# Altium PCB test.PcbDoc
Units mil, origin at the board's own origin, x right, y up, seen from the top; angles counter-clockwise.
Board outline 6000 x 4000 mil, 2 copper layers (Top Layer, Bottom Layer); 63 components, 94 nets, 265 pads, 0 vias.
Unrouted connection lines stored in the file: 164.
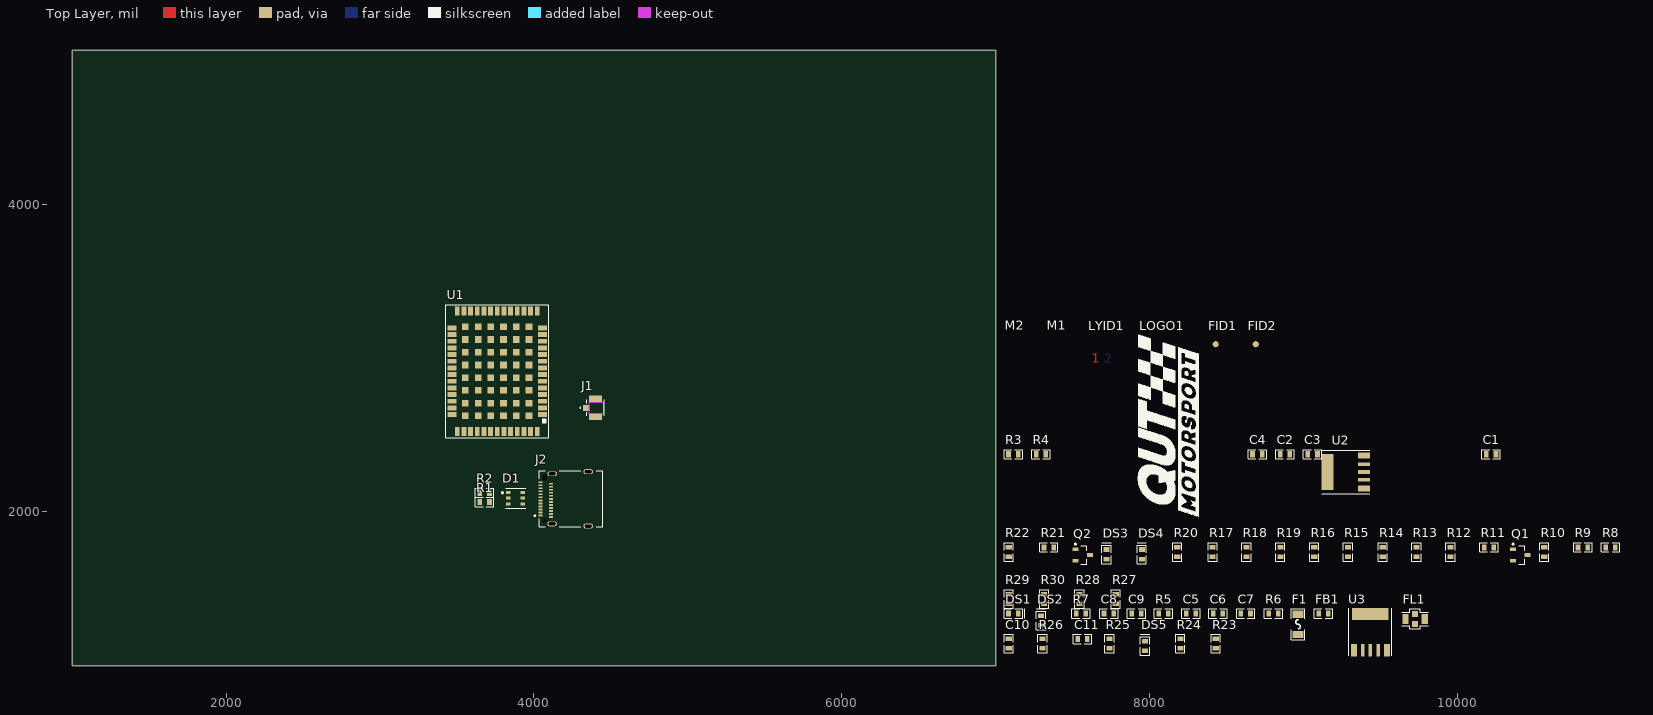
[diagram p0: Top Layer view]
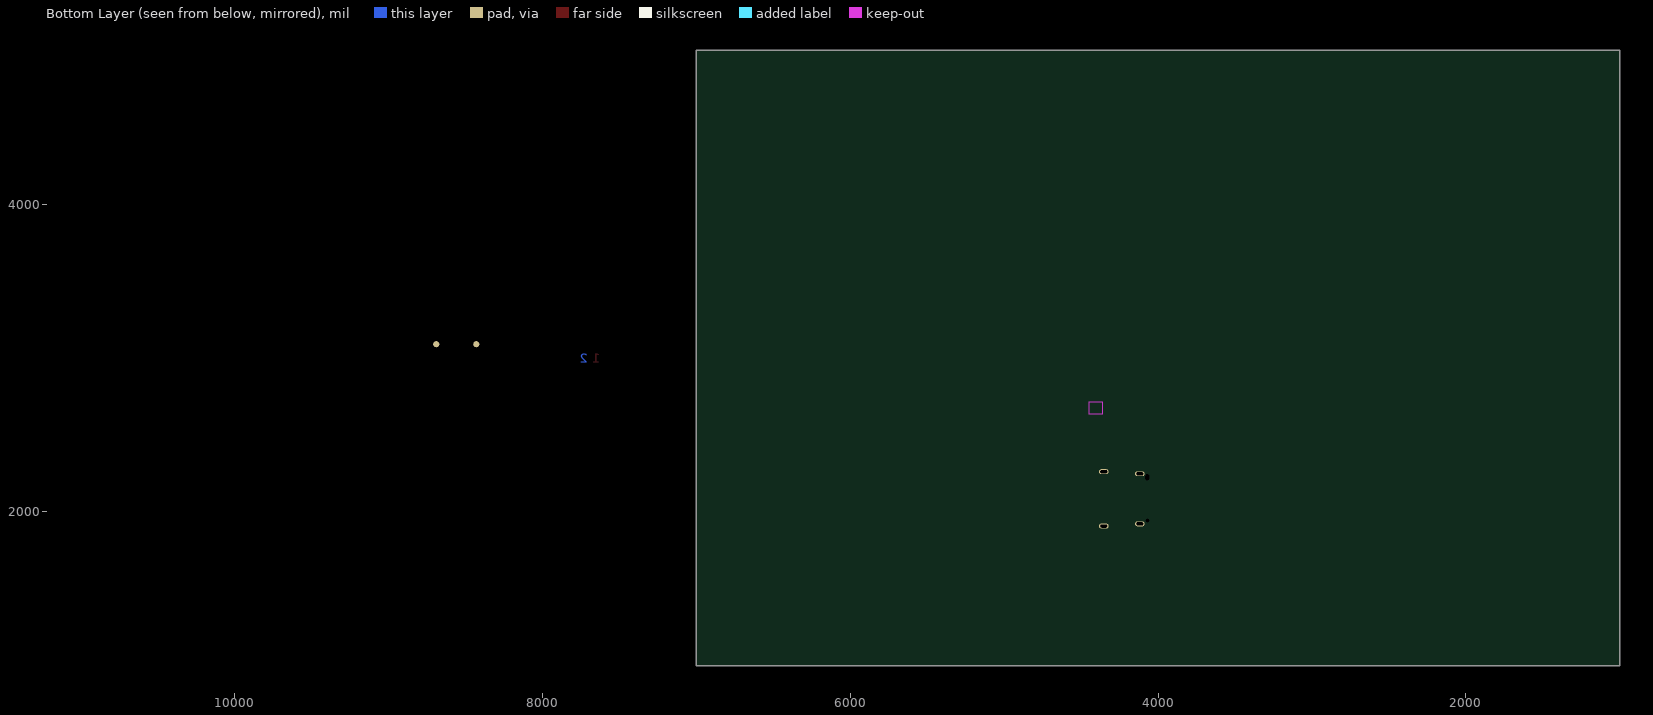
[diagram p1: Bottom Layer view, seen from below]

## Layer stack, top to bottom
Top Solder: solder mask 0.4, Solder Resist, Dk 3.5
Top Layer: signal copper 1.4
Dielectric 1: dielectric 12.6, FR-4, Dk 4.8
Bottom Layer: signal copper 1.4
Bottom Solder: solder mask 0.4, Solder Resist, Dk 3.5

## Board outline
1000,1000 7000,1000 7000,5000 1000,5000

## Design rules (kind name [scope] priority, off if disabled: settings)
Clearance [All] p1: gap=10 ignorepadtopadclearanceinfootprint=FALSE except(0: Arc-Hole Track-Hole SMDPad-Hole THPad-Hole Via-Hole Fill-Hole Poly-Hole Region-Hole Text-Hole)
PolygonConnect [All] p1: connectstyle=Relief reliefconductorwidth=10 reliefentries=4 polygonreliefangle="90 Angle" airgapwidth=10
RoomDefinition Designator [InComponentClass('Designator')] p1: confinementstyle=ConfineIn formatcopy=TRUE lockcomponents=FALSE outline 7045,1060 8585,1060 8585,1315 7045,1315
RoutingVias [All] p1: holewidth=28 width=50 viastyle="Through Hole" minholewidth=28 minwidth=50 maxholewidth=28 maxwidth=50
SolderMaskExpansion [All] p1: expansion=4 istentingtop=FALSE
Width "Schematic Width Constraint" [InNet('GPS RF IN')] p1: maxlimit=13.8 minlimit=13.8 preferedwidth=13.8 minimp=50.000000 maximp=50.000000 favimp=50.000000
Width [All] p2: maxlimit=10 minlimit=10 preferedwidth=10
30 further rules are at their usual default settings.

## Classes and differential pairs
component class RADG-Master-S00-V00: FID1 FID2 LOGO1 LYID1 M1 M2
component class "GPS Module": C1 C2 C3 C4 DS1 DS3 DS4 J1 Q1 Q2 R1 R2 R3 R4 R5 R8 R9 R10 R11 R12 R13 R14 R15 R16 R17 R18 R19 R20 R21 R22 SW1 U1
component class Designator: C5 C6 C7 C8 C9 C10 C11 DS2 DS5 F1 FB1 FL1 R6 R7 R23 R24 R25 R26 U2 U3

## Components (designator, comment, footprint, x,y, rotation, side; value= is the part's Value field where it differs from the comment)
C1 "1uF" Cap_Ceramic_0603 10220,2375 r0 top
C2 "1uF" Cap_Ceramic_0603 8880,2375 r0 top
C3 "100nF" Cap_Ceramic_0603 9060,2375 r0 top
C4 "1uF" Cap_Ceramic_0603 8700,2375 r0 top
C5 "10nF" Cap_Ceramic_0603 8270,1340 r0 top
C6 "1uF" Cap_Ceramic_0603 8445,1340 r0 top
C7 "100nF" Cap_Ceramic_0603 8625,1340 r0 top
C8 "10nF" Cap_Ceramic_0603 7735,1340 r0 top
C9 "1uF" Cap_Ceramic_0603 7915,1340 r0 top
C10 "1uF" Cap_Ceramic_0603 7085,1145 r90 top
C11 "1uF" Cap_Ceramic_0603 7565,1175 r0 top
D1 "PRTR5V0U4D" SC-47 3880,2090 r0 top
DS1 "LED Yellow 0603" "LED YELLOW 0603" 7115,1340 r0 top
DS2 "LED Green 0603" "LED GREEN 0603" 7295,1295 r90 top
DS3 "LED Yellow 0603" "LED YELLOW 0603" 7720,1725 r90 top
DS4 "LED Yellow 0603" "LED YELLOW 0603" 7950,1725 r90 top
DS5 "LED Green 0603" "LED GREEN 0603" 7970,1130 r90 top
F1 "0ZCJ0050FF2G" "1206 Fuse" 8965,1270 r90 top
FB1 "742792651" Inductor_0603 9130,1340 r0 top
FID1 "Fiducial 1MM" "FIDUCIAL 1MM" 8430,3090 r0 top
FID2 "Fiducial 1MM" "FIDUCIAL 1MM" 8690,3090 r90 top
FL1 "NFE31PT101C1E9L" NFE31PT101C1E9L 9725,1305 r0 top
J1 "U.FL-R-SMT HIROSE" "U.FL-R-SMT HIROSE" 4400,2676.93 r0 top
J2 "12401610E4#2A" 12401610E4#2A 4069.06,2085.32 r90 top
LOGO1 "30mm Wide QUTMS Logo" "QUTMS LOGO 30MM" 8320,1970 r90 top
LYID1 "2 Layer Identification PCB Marker" "LAYER IDENT 2" 7680,3000 r0 top
M1 "Hole M3 Loose Unplated" "M3.5 UNPLATED" 7430,3045 r0 top
M2 "Hole M3 Loose Unplated" "M3.5 UNPLATED" 7160,3045 r0 top
Q1 "2N7002" SOT23-3 10410,1720 r0 top
Q2 "2N7002" SOT23-3 7565,1720 r0 top
R1 "33R" Res_ThinFilm_0603 3680,2065 r180 top
R2 "33R" Res_ThinFilm_0603 3680,2125 r180 top
R3 "33R" Res_ThinFilm_0603 7115,2375 r0 top
R4 "33R" Res_ThinFilm_0603 7295,2375 r0 top
R5 "33R" Res_ThinFilm_0603 8090,1340 r0 top
R6 "1k" Res_ThinFilm_0603 8805,1340 r0 top
R7 "0R" Res_ThinFilm_0603 7555,1340 r0 top
R8 "33R" Res_ThinFilm_0603 10995,1770 r0 top
R9 "33R" Res_ThinFilm_0603 10815,1770 r0 top
R10 "33R" Res_ThinFilm_0603 10565,1740 r90 top
R11 "33R" Res_ThinFilm_0603 10205,1770 r0 top
R12 "33R" Res_ThinFilm_0603 9955,1740 r90 top
R13 "33R" Res_ThinFilm_0603 9735,1740 r90 top
R14 "10k" Res_ThinFilm_0603 9515,1740 r90 top
R15 "33R" Res_ThinFilm_0603 9290,1740 r90 top
R16 "33R" Res_ThinFilm_0603 9070,1740 r90 top
R17 "1k" Res_ThinFilm_0603 8410,1740 r90 top
R18 "1k" Res_ThinFilm_0603 8630,1740 r90 top
R19 "1k" Res_ThinFilm_0603 8850,1740 r90 top
R20 "10k 5% 0603" Res_ThinFilm_0603 8180,1740 r90 top
R21 "33R" Res_ThinFilm_0603 7345,1770 r0 top
R22 "10k" Res_ThinFilm_0603 7085,1740 r90 top
R23 "1k" Res_ThinFilm_0603 8430,1145 r90 top
R24 "10k" Res_ThinFilm_0603 8200,1145 r90 top
R25 "DNF 0603" Res_ThinFilm_0603 7740,1145 r90 top
R26 "0R" Res_ThinFilm_0603 7305,1145 r90 top
R27 "22R" Res_ThinFilm_0603 7780,1435 r90 top
R28 "22R" Res_ThinFilm_0603 7545,1435 r90 top
R29 "5k1 1%" Res_ThinFilm_0603 7085,1435 r90 top
R30 "5k1 1%" Res_ThinFilm_0603 7315,1435 r90 top
U1 "ZED-F9P" uBlox_ZED-F9P 4095.63,2480.94 r90 top
U2 "MCP1826T-3302E/DC" SOT-223-5 9275,2260 r90 top
U3 "MCP1826T-3302E/DC" SOT-223-5 9435,1220 r0 top

## Footprints (in the part's own frame and the unit in brackets; to place one, negate y for a bottom-side part, rotate by r counter-clockwise, add the part's x,y. Pads: shape width x height; smd on the part's side, far side on the other; paste and mask are expansions set on the pad)
"1206 Fuse" [mil]
  rect 47x71 smd: 1(-66.08,0) 2(66.08,0)
  silkscreen extent -100,-45 100,45, body extent -67,-33 67,33, height 28
12401610E4#2A [mm]
  rect 0.3x0.7 smd: A1(-2.75,0.66) A2(-2.25,0.66) A3(-1.75,0.66) A4(-1.25,0.66) A5(-0.75,0.66) A6(-0.25,0.66) A7(0.25,0.66) A8(0.75,0.66) A9(1.25,0.66) A10(1.75,0.66) A11(2.25,0.66) A12(2.75,0.66) B1(2.5,-1.04) B2(2,-1.04) B3(1.5,-1.04) B4(1,-1.04) B5(0.5,-1.04) B6(0,-1.04) B7(-0.5,-1.04) B8(-1,-1.04) B9(-1.5,-1.04) B10(-2,-1.04) B11(-2.5,-1.04) B12(-3,-1.04)
  oval 0.8x1.6 hole 0.5 slot 1.1 at 90 deg: S1(-4.13,-1.25) S2(4.13,-1.25) S3(4.49,-7.2) S4(-4.49,-7.2)
  round 0 hole 0.65 unplated: ""(-3.6,0)
  round 0 hole 0.65 slot 1.016 at 0 deg unplated mask+0: ""(3.559,0)
  silkscreen extent -4.6,-9.59 4.6,1.7, body extent -4.6,-9.53 4.6,1.02, height 3.3
Cap_Ceramic_0603 [mil]
  rect 30x40 smd: 1(-31.24,0) 2(31.24,0)
  silkscreen extent -60,-30 60,30, body extent -31,-16 32,16, height 33
"FIDUCIAL 1MM" [mm]
  round 1 smd mask+1: 1(0,0)
  round 1 smd far side mask+1: 1(0,0)
  Top Layer pour cut-out: 0.003,-1.516 -0.579,-1.4 -1.073,-1.07 -1.403,-0.577 -1.518,0.006 -1.518,0.006 -1.403,0.588 -1.073,1.081 -0.579,1.411 0.003,1.527 0.003,1.527 0.585,1.411 1.078,1.081 1.408,0.588 1.524,0.006 1.524,0.006 1.408,-0.577 1.078,-1.07 0.585,-1.4 0.003,-1.516
  Bottom Layer pour cut-out: 0.003,-1.516 -0.579,-1.4 -1.073,-1.07 -1.403,-0.577 -1.518,0.006 -1.518,0.006 -1.315,0.766 -0.758,1.323 0.003,1.527 0.003,1.527 0.585,1.411 1.078,1.081 1.408,0.588 1.524,0.006 1.524,0.006 1.408,-0.577 1.078,-1.07 0.585,-1.4 0.003,-1.516
Inductor_0603 [mil]
  rect 30x40 smd: 1(-31.24,0) 2(31.24,0)
  silkscreen extent -60,-30 60,30, body extent -31,-16 32,16, height 18
"LAYER IDENT 2" [mil]
  Top Layer pour cut-out: -90,50 -90,-50 90,-50 90,50
  Bottom Layer pour cut-out: -90,50 -90,-50 90,-50 90,50
"LED GREEN 0603" [mil]
  rect 30x40 smd: 1(-31.24,0) 2(31.24,0)
  silkscreen extent -60,-30 75,30, body extent -40,-20 40,20, height 30
"LED YELLOW 0603" [mil]
  rect 30x40 smd: 1(-31.24,0) 2(31.24,0)
  silkscreen extent -60,-30 75,30, body extent -40,-20 40,20, height 30
"M3.5 UNPLATED" [mm]
  round 0 hole 3.5 unplated mask+2.6: 1(0,0)
  Top Layer pour cut-out: 0,-2.794 -1.069,-2.581 -1.976,-1.976 -2.581,-1.069 -2.794,0 -2.794,0 -2.581,1.069 -1.976,1.976 -1.069,2.581 0,2.794 0,2.794 1.069,2.581 1.976,1.976 2.581,1.069 2.794,0 2.794,0 2.581,-1.069 1.976,-1.976 1.069,-2.581 0,-2.794
  Bottom Layer pour cut-out: 0,-2.794 -1.069,-2.581 -1.976,-1.976 -2.581,-1.069 -2.794,0 -2.794,0 -2.581,1.069 -1.976,1.976 -1.069,2.581 0,2.794 0,2.794 1.069,2.581 1.976,1.976 2.581,1.069 2.794,0 2.794,0 2.581,-1.069 1.976,-1.976 1.069,-2.581 0,-2.794
NFE31PT101C1E9L [mm]
  rect 1x1.6 smd: 1(-1.6,0) 3(1.6,0)
  rect 1x1 smd: 2(0,-0.8) 2(0,0.8)
  silkscreen extent -2.16,-1.65 2.16,1.65, body extent -1.6,-0.89 1.6,0.86, height 1.61
"QUTMS LOGO 30MM" [mil]
  silkscreen extent -1,1 1182,398
Res_ThinFilm_0603 [mil]
  rect 30x40 smd: 1(-31.24,0) 2(31.24,0)
  silkscreen extent -60,-30 60,30, body extent -31,-16 32,16, height 18
SC-47 [mm]
  rect 0.8x0.5 smd: 1(-1.2,0.95) 2(-1.2,0) 3(-1.2,-0.95) 4(1.2,-0.95) 5(1.2,0) 6(1.2,0.95)
  silkscreen extent -2.29,-1.65 1.65,1.65, body extent -1.3,-1.45 1.3,1.45, height 1.14
SOT23-3 [mm] "SOT23, 3-Leads, Body 2.90x2.45mm, Pitch 0.95mm, IPC Medium Density"
  rect 1x0.6 smd: D(1.2,0) G(-1.2,0.95) S(-1.2,-0.95)
  silkscreen extent -1.32,-1.5 0.7,1.92, body extent -1.3,-1.5 1.3,1.5, height 1.1
SOT-223-5 [mm]
  rect 1x2 smd: 1(-2.74,-3) 5(2.74,-3)
  rect 0.6x2 smd: 2(-1.27,-3) 3(0,-3) 4(1.27,-3)
  rect 6x2 smd: EP(0,3)
  silkscreen extent -3.56,-3.94 3.56,3.94, body extent -3.27,-3.63 3.28,3.63, height 1.8
"U.FL-R-SMT HIROSE" [mm]
  rect 1.05x1 smd: 1(-1.525,0)
  rect 2.2x1.05 smd: 2(0,-1.475) 2(0,1.475)
  Keep-Out Layer region: 1.3,-0.95 -1,-0.95 -1,0.95 1.3,0.95
  silkscreen extent -2.57,-1.3 1.42,1.3, body extent -1.55,-1.5 1.55,1.5, height 1.25
uBlox_ZED-F9P [mm]
  rect 0.8x1.5 smd: 1(3.85,1.05) 2(4.95,1.05) 3(6.05,1.05) 4(7.15,1.05) 5(8.25,1.05) 6(9.35,1.05) 7(10.45,1.05) 8(11.55,1.05) 9(12.65,1.05) 10(13.75,1.05) 11(14.85,1.05) 12(15.95,1.05) 13(17.05,1.05) 14(18.15,1.05) 28(18.15,15.95) 29(17.05,15.95) 30(15.95,15.95) 31(14.85,15.95) 32(13.75,15.95) 33(12.65,15.95) 34(11.55,15.95) 35(10.45,15.95) 36(9.35,15.95) 37(8.25,15.95) 38(7.15,15.95) 39(6.05,15.95) 40(4.95,15.95) 41(3.85,15.95)
  rect 1.5x0.8 smd: 15(20.95,1.9) 16(20.95,3) 17(20.95,4.1) 18(20.95,5.2) 19(20.95,6.3) 20(20.95,7.4) 21(20.95,8.5) 22(20.95,9.6) 23(20.95,10.7) 24(20.95,11.8) 25(20.95,12.9) 26(20.95,14) 27(20.95,15.1) 42(1.05,15.1) 43(1.05,14) 44(1.05,12.9) 45(1.05,11.8) 46(1.05,10.7) 47(1.05,9.6) 48(1.05,8.5) 49(1.05,7.4) 50(1.05,6.3) 51(1.05,5.2) 52(1.05,4.1) 53(1.05,3) 54(1.05,1.9)
  rect 1.1x1.1 smd: 55(3.65,7.45) 55(3.65,9.55) 55(3.65,11.65) 55(3.65,13.75) 55(3.65,3.25) 55(3.65,5.35) 55(5.75,7.45) 55(5.75,9.55) 55(5.75,11.65) 55(5.75,13.75) 55(5.75,3.25) 55(5.75,5.35) 55(7.85,13.75) 55(7.85,3.25) 55(7.85,5.35) 55(7.85,7.45) 55(7.85,9.55) 55(7.85,11.65) 55(9.95,13.75) 55(9.95,3.25) 55(9.95,5.35) 55(9.95,7.45) 55(9.95,9.55) 55(9.95,11.65) 55(12.05,13.75) 55(12.05,3.25) 55(12.05,5.35) 55(12.05,7.45) 55(12.05,9.55) 55(12.05,11.65) 55(14.15,3.25) 55(14.15,5.35) 55(14.15,7.45) 55(14.15,9.55) 55(14.15,11.65) 55(14.15,13.75) 55(16.25,3.25) 55(16.25,5.35) 55(16.25,7.45) 55(16.25,9.55) 55(16.25,11.65) 55(16.25,13.75) 55(18.35,3.25) 55(18.35,5.35) 55(18.35,7.45) 55(18.35,9.55) 55(18.35,11.65) 55(18.35,13.75)
  silkscreen extent 0,0 22,17, body extent 0,0 22,17, height 2.3

## Part data
C1 C2 C4 C6 C9 C10 C11: library part "1uF 25V 5% X7R 0603", "Capacitor, Ceramic, SMD, 1uF, 25V, 5%, X7R, 0603"
C3 C7: library part "100nF 50V 5% X7R 0603", "Capacitor, Ceramic, SMD, 100nF, 50V, 5%, X7R, 0603"
C5 C8: library part "10nF 50V 5% X7R 0603", "Capacitor, Ceramic, SMD, 10nF, 50V, 5%, X7R, 0603"
D1: "Clamp Ipp Tvs Diode Surface Mount 6-TSOP"
F1: "Polymeric PTC Resettable Fuse 8V 500mA Ih Surface Mount 1206 (3216 Metric), Concave"
FB1: "600 Ohms @ 100MHz 1 Signal Line Ferrite Bead 0603 (1608 Metric) 1A 200mOhm"
FL1: "LC (T-Type) EMI Filter 3rd Order Low Pass 1 Channel C = 100pF 6A 1206 (3216 Metric), 3 PC Pad"
J1: library part U.FL-R-SMT(10), "U.FL (UMCC) Connector Receptacle, Male Pin 50Ohm Surface Mount Solder"
J2: "USB-C (USB TYPE-C) USB 3.2 Gen 2 (USB 3.1 Gen 2, Superspeed + (USB 3.1)) Receptacle Connector 24 Position Surface Mount, Right Angle; Through Hole"
LOGO1: library part "QUTMS Logo 30mm"
LYID1: library part "Layer Identification 2"
M1 M2: "M3.5 Hole, No Plating"
R1 R2 R3 R4 R5 R8 R9 R10 R11 R12 R13 R15 R16 R21: library part "33R 5% 0603", "Resistor, SMD, 33R, 0.1W, 5%, 0603"
R6 R17 R18 R19 R23: library part "1k 5% 0603", "Resistor, SMD, 1k, 0.1W, 5%, 0603"
R7 R26: library part "0R 5% 0603", "Resistor, SMD, 0R, 0.1W, 5%, 0603"
R14 R22 R24: library part "10k 5% 0603", "Resistor, SMD, 10k, 0.1W, 5%, 0603"
R20: "Resistor, SMD, 10k, 0.1W, 5%, 0603"
R25: "Resistor, SMD, DNF, 0.1W, 0603"
R27 R28: library part "22R 5% 0603", "Resistor, SMD, 22R, 0.1W, 5%, 0603"
R29 R30: library part "5k1 1% 0603", "Resistor, SMD, 5k1, 0.1W, 1%, 0603"
U2 U3: "Linear Voltage Regulator IC Positive Fixed 1 Output 1A SOT-223-5"

## Nets (pads, with @x,y where several pads share a name; then routed paths per layer and width w, separated by ;. In a path a pad name is that pad's centre, name@x,y a point inside that pad or via, vN(x,y) a via of type N, cw(c..) or ccw(c..) an arc to the next point about the centre after c; other vN are vias at no path point)
3V3: C2.2 C3.2 C7.2 FL1.3 R6.2 R20.2 U1.33 U1.34
"3V3 LED": DS2.1 R6.1
5V: C8.2 C9.2 C10.2 FB1.2 R23.2 R25.1 U2.1 U2.2 U3.2
"5V LED": DS5.1 R23.1
"CON DSEL": R12.2
"CON DSEL M": Q1.G R12.1 R14.2
"CON EXTINT": R11.1
"CON GEOFENCE": R15.1 R18.2
"CON RESET": R21.2
"CON RESET M": Q2.G R21.1 R22.2
"CON RTK STAT": R16.1 R19.2
"CON RXD2": R5.1
"CON RXD / SPI MOSI": R2.1
"CON SAFEBOOT": R10.1
"CON SCL / SPI CLK": R4.1
"CON SDA / SPI CS": R3.1
"CON TIMEPULSE": R13.1 R17.2
"CON TX READY": R9.1
"CON TXD2": R8.1
"CON TXD / SPI MISO": R1.1
"GEOFENCE LED": DS3.1 R18.1
GND: C1.1 C2.1 C3.1 C4.1 C7.1 D1.2 DS2.2 J2.A1 J2.A12 J2.B1 J2.B12 J2.S1 J2.S2 J2.S3 J2.S4 Q1.S R7.2 R14.1 R29.1 R30.1 U1.1 U1.3 U1.12 U1.14 U1.32 U1.37 U1.41 U1.48 U1.55
"GPS ANT DET": U1.4
"GPS ANT OFF": U1.5
"GPS ANT SHORT": U1.6
"GPS DSEL": Q1.D U1.47
"GPS EXTINT": R11.2 U1.51
"GPS GEOFENCE": R15.2 U1.19
"GPS RESERVED0": U1.8
"GPS RESERVED1": U1.9
"GPS RESERVED2": U1.10
"GPS RESERVED3": U1.11
"GPS RESERVED4": U1.13
"GPS RESERVED5": U1.15
"GPS RESERVED6": U1.16
"GPS RESERVED7": U1.17
"GPS RESERVED8": U1.18
"GPS RESERVED9": U1.21
"GPS RESERVED10": U1.22
"GPS RESERVED11": U1.23
"GPS RESERVED12": U1.24
"GPS RESERVED13": U1.25
"GPS RESERVED14": U1.28
"GPS RESERVED15": U1.29
"GPS RESERVED16": U1.30
"GPS RESERVED17": U1.31
"GPS RESERVED18": U1.35
"GPS RESERVED19": U1.52
"GPS RESERVED20": U1.54
"GPS RESET": Q2.D R20.1 U1.49
"GPS RF IN": J1.1 U1.2
"GPS RTK STAT": R16.2 U1.20
"GPS RXD2": R5.2 U1.26
"GPS RXD / SPI MOSI": R2.2 U1.43
"GPS SAFEBOOT": R10.2 U1.50
"GPS SCL / SPI CLK": R4.2 U1.45
"GPS SDA / SPI CS": R3.2 U1.44
"GPS TIMEPULSE": R13.2 U1.53
"GPS TX READY": R9.2 U1.46
"GPS TXD2": R8.2 U1.27
"GPS TXD / SPI MISO": R1.2 U1.42
N3V3: C6.2 FL1.1 R24.2 U2.4
NGND: C5.1 C6.1 C8.1 C9.1 C10.1 C11.1 DS1.2 DS3.2 DS4.2 DS5.2 FL1.2 Q2.S R7.1 R22.1 U2.3 U3.3
"PWR EP USB": U2.EP U3.EP
"PWR GOOD": R24.1 R26.1 U2.5
"PWR GOOD B": R25.2 R26.2 U3.1
"PWR GOOD USB": U3.5
"RF GND": J1.2
RTC: 
"RTC SW": C1.2 C4.2 U1.36
"RTC SW N/C A": 
"RTC SW N/C B": 
"RTK LED": DS4.1 R19.1
"TIMEPULSE LED": DS1.1 R17.1
USB3V3: C11.2 U1.38 U3.4
"USB CC1": J2.A5 R29.2
"USB CC2": J2.B5 R30.2
"USB D_N": D1.1 D1.6 J2.A7 J2.B7 R28.1
"USB D_P": D1.3 D1.4 J2.A6 J2.B6 R27.1
"USB DP_N": R27.2 U1.39
"USB RX1_N": J2.B10
"USB RX1_P": J2.B11
"USB RX2_N": J2.A10
"USB RX2_P": J2.A11
"USB SBU1": J2.A8
"USB SBU2": J2.B8
"USB TX1_N": J2.A3
"USB TX1_P": J2.A2
"USB TX2_N": J2.B3
"USB TX2_P": J2.B2
VBUS: D1.5
"VCC RF": U1.7
VUSB: F1.1 J2.A4 J2.A9 J2.B4 J2.B9
VUSBF: C5.2 F1.2 FB1.1
pads on no net: FID1.1 FID2.1 J2. M1.1 M2.1 R28.2 U1.40

## Text inside footprints (layer, text, board x,y; h text height)
LYID1: Top Layer "1" at 7625,2970 h60; Bottom Layer "2" at 7705,2970 h60